# Altium PCB Touch_Screen.PcbDoc
Units mm, origin at the board's own origin, x right, y up, seen from the top; angles counter-clockwise.
Board outline 152.4 x 101.6 mm, 2 copper layers (Top Layer, Bottom Layer); 50 components, 72 nets, 255 pads, 54 vias.
Unrouted connection lines stored in the file: 9.
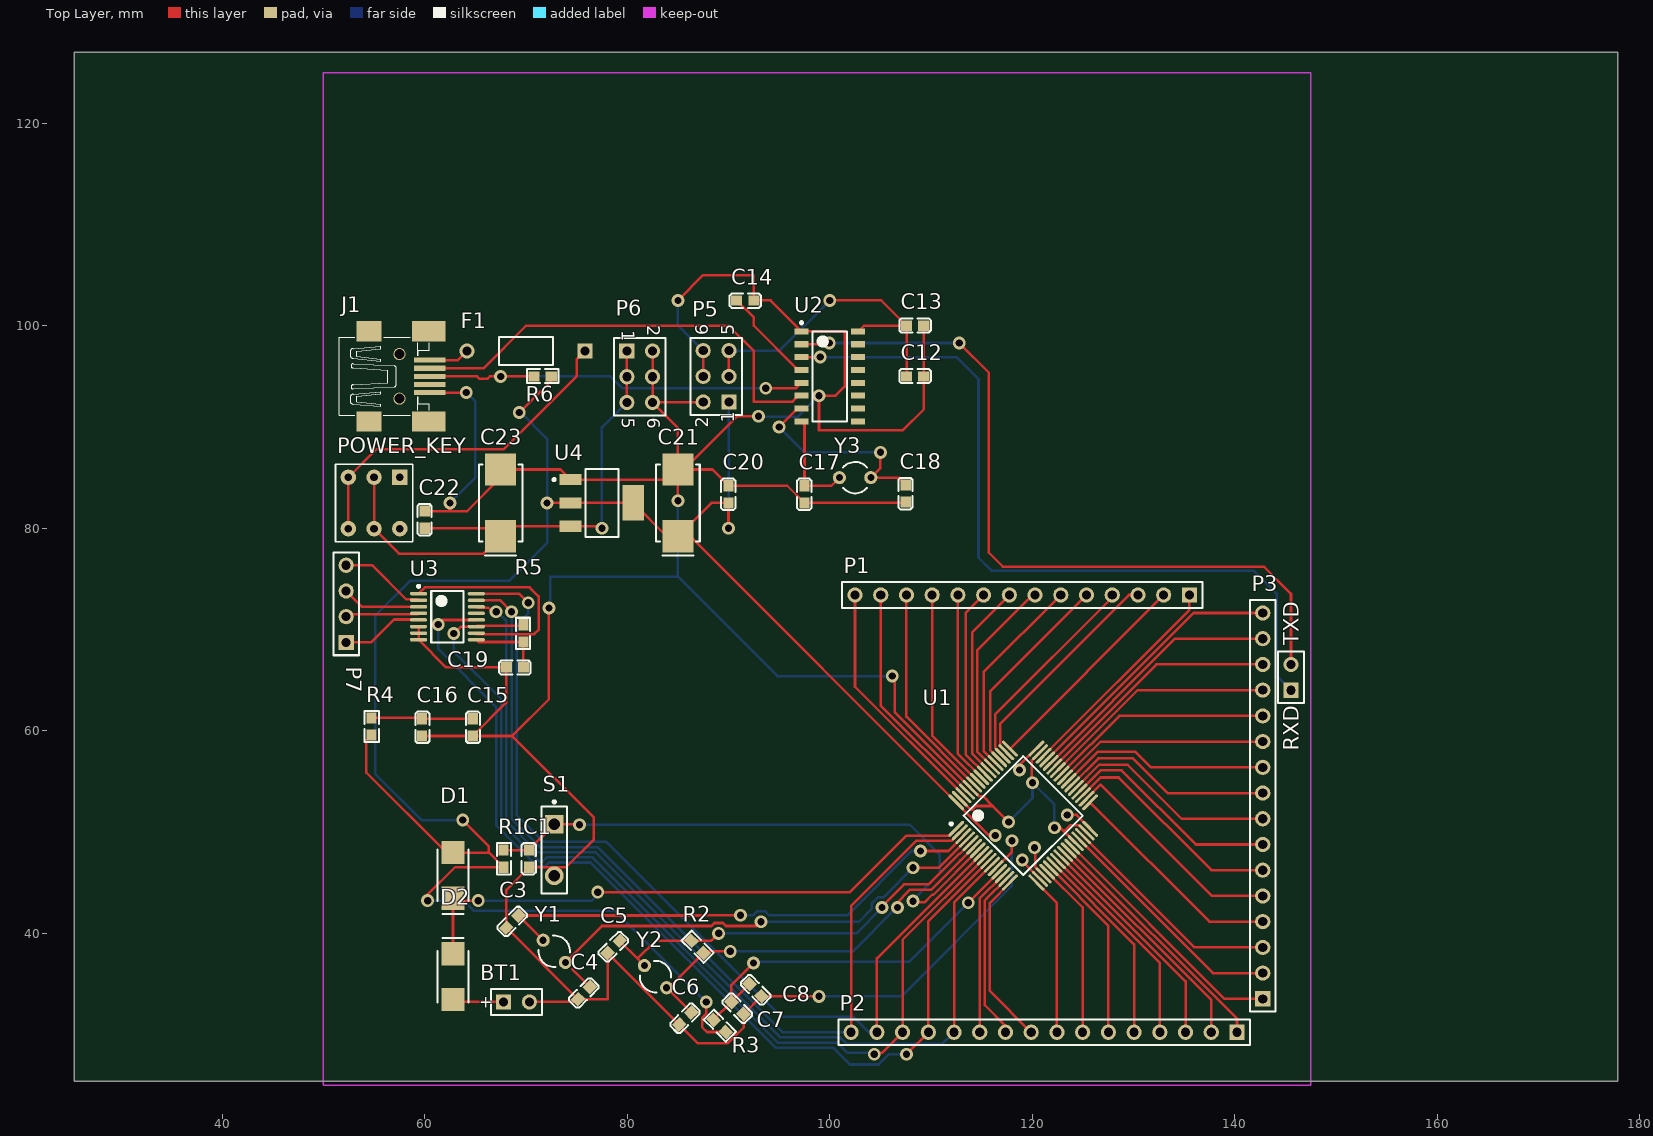
[diagram p0: Top Layer view]
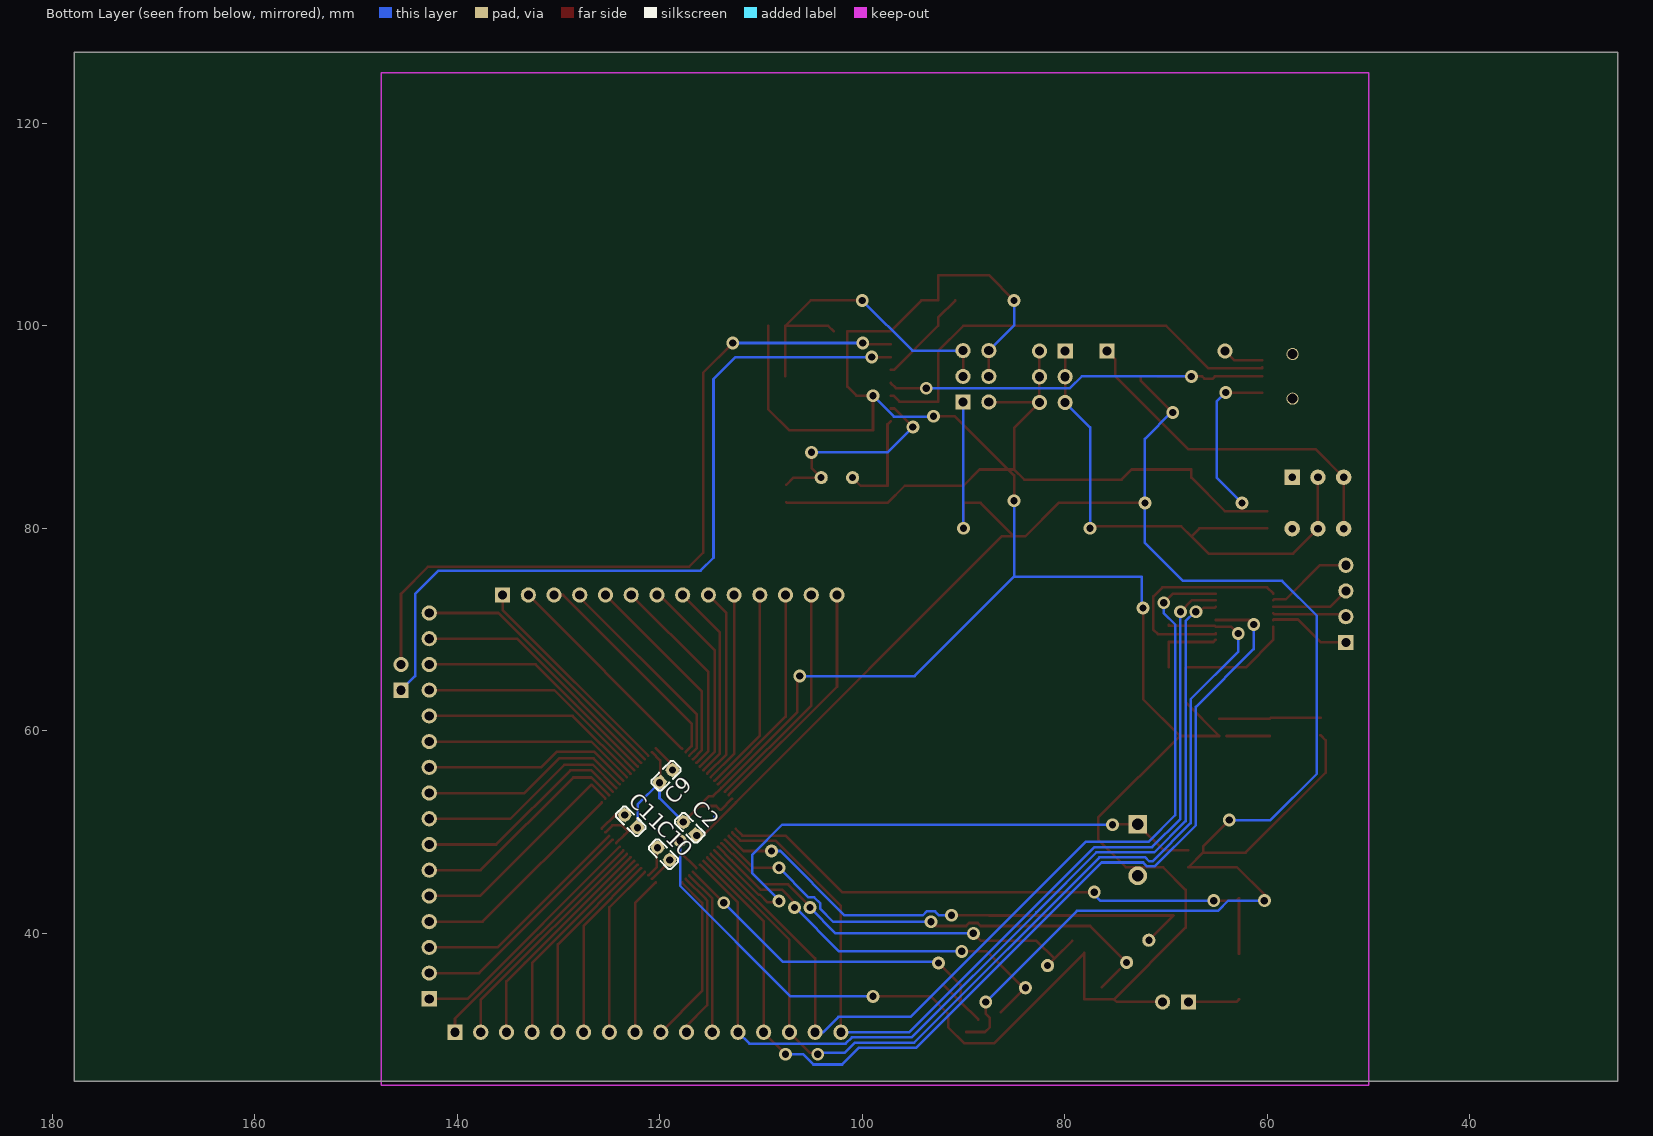
[diagram p1: Bottom Layer view, seen from below]

## Layer stack, top to bottom
Top Solder: solder mask 0.0102, Solder Resist, Dk 3.5
Top Layer: signal copper 0.0356
Dielectric 1: dielectric 0.32, FR-4, Dk 4.8
Bottom Layer: signal copper 0.0356
Bottom Solder: solder mask 0.0102, Solder Resist, Dk 3.5

## Board outline
25.4,25.4 177.8,25.4 177.8,127 25.4,127

## Design rules (kind name [scope] priority, off if disabled: settings)
Clearance [All] p1: gap=0.254
PolygonConnect [All] p1: connectstyle=Relief reliefconductorwidth=0.254 reliefentries=4 polygonreliefangle="90 Angle" airgapwidth=0.254
RoomDefinition miniSystrm [InComponentClass('miniSystrm')] p1: confinementstyle=ConfineIn formatcopy=TRUE lockcomponents=FALSE outline 0,0 50.8,0 50.8,25.4 0,25.4
RoutingVias [All] p1: holewidth=0.711 width=1.27 viastyle="Through Hole" minholewidth=0.711 minwidth=1.27 maxholewidth=0.711 maxwidth=1.27
SolderMaskExpansion [All] p1: expansion=0.102
Width [All] p1: maxlimit=0.254 minlimit=0.254 preferedwidth=0.254
30 further rules are at their usual default settings.

## Components (designator, comment, footprint, x,y, rotation, side; value= is the part's Value field where it differs from the comment)
BT1 "" BAT-2 69.064,33.229 r0 top
C1 "" CAP-0603 70.294,46.529 r90 top
C2 "" CAP-0603 117.661,50.995 r225 bottom
C3 "" CAP-0603 68.056,40.562 r45 top
C4 "" CAP-0603 75.127,33.491 r45 top
C5 "" CAP-0603 78.056,38.062 r45 top
C6 "" CAP-0603 85.127,30.991 r45 top
C7 "" CAP-0603 91.488,32.035 r135 top
C8 "" CAP-0603 92.062,34.997 r315 top
C9 "" CAP-0603 119.947,54.941 r135 bottom
C10 "" CAP-0603 118.999,47.253 r45 bottom
C11 "" CAP-0603 122.242,50.496 r45 bottom
C12 "" CAP-0603 107.58,95 r0 top
C13 "" CAP-0603 107.58,100 r0 top
C14 "" CAP-0603 92.5,102.5 r180 top
C15 "" CAP-0603 64.746,61.192 r270 top
C16 "" CAP-0603 59.746,61.192 r270 top
C17 "" CAP-0603 97.5,82.5 r90 top
C18 "" CAP-0603 107.5,82.58 r90 top
C19 "" CAP-0603 69.746,66.272 r180 top
C20 "" CAP-0603 90,82.5 r90 top
C21 "" CAP-7343 85,82.5 r90 top
C22 "" CAP-0603 60,80 r90 top
C23 "" CAP-7343 67.5,82.5 r90 top
D1 "" DIODE-SMA 62.794,45.729 r270 top
D2 "" DIODE-SMA 62.794,35.729 r90 top
F1 "500mA" PIN-W2/E2.8 70,97.5 r180 top
J1 "Mini_USB" miniUSB 57.5,95 r0 top
P1 "Header 14" HDR1X14 135.509,73.415 r180 top
P2 "Header 16" HDR1X16 140.208,30.235 r180 top
P3 "Header 16" HDR1X16 142.748,33.537 r90 top
P5 "VCC3.3" HDR2X3 90.04,92.46 r90 top
P6 "VCC5" HDR2X3 79.96,97.5 r270 top
P7 "Header 4" HDR1X4 52.246,68.732 r90 top
POWER_KEY "BUTTON" 六脚自锁开关 55,82.5 r270 top
R1 "" RES-0603 67.794,48.229 r270 top
R2 "" RES-0603 86.33,39.265 r315 top
R3 "" RES-0603 88.526,31.461 r315 top
R4 "" RES-0603 54.746,61.272 r270 top
R5 "" RES-0603 69.746,68.772 r90 top
R6 "" RES-0603 70.8,95 r0 top
S1 "RESET" SPST-2 72.794,48.229 r270 top
TXD "Header 2" HDR1X2 145.542,64.008 r90 top (schematic designator P4)
U1 "STM32F103RCT6" LQFP-64 119.097,51.634 r45 top
U2 "CH340G" SOP16 100,95 r0 top
U3 "XPT2046" TSSOP-16 62.246,71.272 r0 top
U4 "AMS1117-3.3" SOT223 77.5,82.5 r270 top
Y1 "32.768K" R38 72.794,38.229 r225 top
Y2 "32.768K" R38 82.794,35.729 r225 top
Y3 "12MHZ" R38 102.5,85 r270 top

## Footprints (in the part's own frame and the unit in brackets; to place one, negate y for a bottom-side part, rotate by r counter-clockwise, add the part's x,y. Pads: shape width x height; smd on the part's side, far side on the other; paste and mask are expansions set on the pad)
BAT-2 [mm] "Battery; 2 Leads"
  rect 1.5x1.5 hole 0.9: 1(-1.27,0)
  round 1.5 hole 0.9: 2(1.27,0)
  silkscreen extent -2.54,-1.27 2.54,1.27
CAP-0603 [mm]
  rect 1.1x1 smd: 1(0,0) 2(1.7,0)
  silkscreen extent -0.71,-0.67 2.39,0.73
CAP-7343 [mm] "钽电容"
  rect 3.2x3.05 smd: 1(-3.302,0) 2(3.302,0)
  silkscreen extent -5.21,-2.16 3.81,2.16, body extent -3.68,-1.91 3.68,1.91, height 2.95
DIODE-SMA [mm] "贴片二极管"
  rect 2.3x2.3 smd: 1(-2.25,0) 2(2.25,0)
  silkscreen extent -2.54,-1.52 3.81,1.52, body extent -2.92,-1.4 2.92,1.4, height 3
HDR1X2 [mm] "Connector; Header; 2 Position"
  rect 1.5x1.5 hole 0.9: 1(0,0)
  round 1.5 hole 0.9: 2(2.54,0)
  silkscreen extent -1.27,-1.27 3.81,1.27
HDR1X4 [mm] "Connector; Header; 4 Position"
  rect 1.5x1.5 hole 0.9: 1(0,0)
  round 1.5 hole 0.9: 2(2.54,0) 3(5.08,0) 4(7.62,0)
  silkscreen extent -1.27,-1.27 8.89,1.27
HDR1X14 [mm] "Connector; Header; 14 Position"
  rect 1.5x1.5 hole 0.9: 1(0,0)
  round 1.5 hole 0.9: 2(2.54,0) 3(5.08,0) 4(7.62,0) 5(10.16,0) 6(12.7,0) 7(15.24,0) 8(17.78,0) 9(20.32,0) 10(22.86,0) 11(25.4,0) 12(27.94,0) 13(30.48,0) 14(33.02,0)
  silkscreen extent -1.27,-1.27 34.29,1.27
HDR1X16 [mm] "Connector; Header; 16 Position"
  rect 1.5x1.5 hole 0.9: 1(0,0)
  round 1.5 hole 0.9: 2(2.54,0) 3(5.08,0) 4(7.62,0) 5(10.16,0) 6(12.7,0) 7(15.24,0) 8(17.78,0) 9(20.32,0) 10(22.86,0) 11(25.4,0) 12(27.94,0) 13(30.48,0) 14(33.02,0) 15(35.56,0) 16(38.1,0)
  silkscreen extent -1.27,-1.27 39.37,1.27
HDR2X3 [mm] "Connector; Header; 3x2 Position"
  rect 1.5x1.5 hole 0.9: 1(0,0)
  round 1.5 hole 0.9: 2(0,2.54) 3(2.54,0) 4(2.54,2.54) 5(5.08,0) 6(5.08,2.54)
  silkscreen extent -1.27,-1.27 6.35,3.81
LQFP-64 [mm] "LQFP64"
  oval 2.1x0.3 smd: 1(-5.6,3.75) 2(-5.6,3.25) 3(-5.6,2.75) 4(-5.6,2.25) 5(-5.6,1.75) 6(-5.6,1.25) 7(-5.6,0.75) 8(-5.6,0.25) 9(-5.6,-0.25) 10(-5.6,-0.75) 11(-5.6,-1.25) 12(-5.6,-1.75) 13(-5.6,-2.25) 14(-5.6,-2.75) 15(-5.6,-3.25) 16(-5.6,-3.75) 33(5.6,-3.75) 34(5.6,-3.25) 35(5.6,-2.75) 36(5.6,-2.25) 37(5.6,-1.75) 38(5.6,-1.25) 39(5.6,-0.75) 40(5.6,-0.25) 41(5.6,0.25) 42(5.6,0.75) 43(5.6,1.25) 44(5.6,1.75) 45(5.6,2.25) 46(5.6,2.75) 47(5.6,3.25) 48(5.6,3.75)
  oval 0.3x2.1 smd: 17(-3.75,-5.6) 18(-3.25,-5.6) 19(-2.75,-5.6) 20(-2.25,-5.6) 21(-1.75,-5.6) 22(-1.25,-5.6) 23(-0.75,-5.6) 24(-0.25,-5.6) 25(0.25,-5.6) 26(0.75,-5.6) 27(1.25,-5.6) 28(1.75,-5.6) 29(2.25,-5.6) 30(2.75,-5.6) 31(3.25,-5.6) 32(3.75,-5.6) 49(3.75,5.6) 50(3.25,5.6) 51(2.75,5.6) 52(2.25,5.6) 53(1.75,5.6) 54(1.25,5.6) 55(0.75,5.6) 56(0.25,5.6) 57(-0.25,5.6) 58(-0.75,5.6) 59(-1.25,5.6) 60(-1.75,5.6) 61(-2.25,5.6) 62(-2.75,5.6) 63(-3.25,5.6) 64(-3.75,5.6)
  silkscreen extent -5.72,-4.15 4.15,4.57, body extent -5,-5 5,5, height 1.6
miniUSB [mm]
  rect 2.5x2 smd: 0(-3,-4.45) 0(-3,4.45)
  rect 3.3x2 smd: 0(2.9,-4.45) 0(2.9,4.45)
  rect 3.1x0.5 smd: 1(3,1.6) 2(3,0.8) 3(3,0) 4(3,-0.8) 5(3,-1.6)
  round 1.2 hole 1 unplated: ""(0,-2.2) ""(0,2.2)
  silkscreen extent -5.92,-3.85 2.96,3.85
PIN-W2/E2.8 [mm] "Thru-Hole; 2 Leads"
  rect 1.5x1.5 hole 0.9: 1(-5.825,0)
  round 1.5 hole 0.9: 2(5.825,0)
  silkscreen extent -2.65,-1.4 2.65,1.4
R38 [mm] "Crystal, Thru-Hole; 2 Leads; Body 3.1 x 8.2 mm (Dia.xH)"
  round 1.3 hole 0.7: 1(0,1.55) 2(0,-1.55)
  silkscreen extent -1.55,-1.19 1.55,1.17
RES-0603 [mm] "1/10W"
  rect 1.1x1 smd: 1(0,0) 2(1.7,0)
  silkscreen extent -0.71,-0.67 2.39,0.73
SOP16 [mm] "SOP, 16-Leads, Body 8.55x3.95mm, Pitch 1.27mm, IPC Medium Density"
  rect 1.4x0.6 smd: 1(-2.8,4.445) 2(-2.8,3.175) 3(-2.8,1.905) 4(-2.8,0.635) 5(-2.8,-0.635) 6(-2.8,-1.905) 7(-2.8,-3.175) 8(-2.8,-4.445) 9(2.8,-4.445) 10(2.8,-3.175) 11(2.8,-1.905) 12(2.8,-0.635) 13(2.8,0.635) 14(2.8,1.905) 15(2.8,3.175) 16(2.8,4.445)
  silkscreen extent -2.92,-4.45 1.7,5.42, body extent -2.1,-4.45 2.1,4.45, height 1.7
SOT223 [mm] "SOT-223/SC-73; 4 Leads; Body 6.7 x 7.3 mm, inc. leads (LxW max)"
  rect 1.1x2.15 smd: 1(-2.3,-3.1) 2(0,-3.1) 3(2.3,-3.1)
  rect 3.5x2.15 smd: 4(0,3.1)
  silkscreen extent -3.35,-4.85 3.35,1.63
SPST-2 [mm] "Switch; 2 Leads"
  rect 1.85x1.85 hole 1.1: 1(-2.54,0)
  round 1.85 hole 1.1: 2(2.54,0)
  silkscreen extent -4.89,-1.27 4.28,1.27
TSSOP-16 [mm]
  oval 1.7x0.35 smd: 1(-2.85,2.275) 2(-2.85,1.625) 3(-2.85,0.975) 4(-2.85,0.325) 5(-2.85,-0.325) 6(-2.85,-0.975) 7(-2.85,-1.625) 8(-2.85,-2.275) 9(2.85,-2.275) 10(2.85,-1.625) 11(2.85,-0.975) 12(2.85,-0.325) 13(2.85,0.325) 14(2.85,0.975) 15(2.85,1.625) 16(2.85,2.275)
  silkscreen extent -2.97,-2.55 1.6,3.12, body extent -2.25,-2.55 2.25,2.55, height 1.1
六脚自锁开关 [mil]
  rect 60x60 hole 30: 1(-100,100)
  round 60 hole 30: 2(-100,0) 3(-100,-100) 4(100,-100) 5(100,0) 6(100,100)
  silkscreen extent -150,-150 150,150

## Part data
BT1: library part Battery, "Multicell Battery"
C1 C2 C3 C4 C5 C6 C7 C8 C9 C10 C11 C12 C13 C14 C15 C16 C17 C18 C19 C20 C22: library part Cap, "Capacitor"
C21 C23: library part "Cap Pol1", "Polarized Capacitor (Radial)"
D1 D2: library part "Diode 1N4001", "1 Amp General Purpose Rectifier"
F1: library part "Fuse 1", "Fuse"
J1: "USB 2.0, Right Angle, SMT, B Type, Receptacle, 5 Position, Black"
P1: "Header, 14-Pin"
P2 P3: "Header, 16-Pin"
P5 P6: library part "Header 3X2", "Header, 3-Pin, Dual row"
P7: "Header, 4-Pin"
R1 R2 R3 R4 R5 R6: library part Res2, "Resistor"
S1: library part SW-PB, "Switch"
TXD: "Header, 2-Pin"
Y1 Y2 Y3: library part XTAL, "Crystal Oscillator"

## Via types
v1: diameter 1.27, hole 0.711, Top Layer to Bottom Layer, 54 vias

## Nets (pads, with @x,y where several pads share a name; then routed paths per layer and width w, separated by ;. In a path a pad name is that pad's centre, name@x,y a point inside that pad or via, vN(x,y) a via of type N, cw(c..) or ccw(c..) an arc to the next point about the centre after c; other vN are vias at no path point)
BOOT0: BT1.2 C1.1 C2.1 C3.1 C4.1 C5.1 C6.1 C7.1 C8.2 C9.1 C10.1 C11.1 C12.2 C13.2 C14.1 C15.2 C16.2 C17.1 C18.1 C19.2 C20.2 C21.2 C22.2 C23.2 J1.5 P5.2 P5.4 P5.6 P6.2 P6.4 P6.6 S1.2 U1.12 U1.18 U1.28 U1.31 U1.47 U1.60 U1.63 U2.1 U3.6 U3.7 U3.8 U4.1 | length 411.4
  Top Layer w0.254: U3.6 U3.7 U3.8 62.121,66.272 C19.2 68.046,62.792 C15.2 68.636,59.492 ; C16.2 64.026,59.492 ; C22.2 62.5,81.7 ; J1.5 v1(64.1,93.4) ; v1(62.5,82.5) 62.5,81.7 ; BT1.2 74.865,33.229 C4.1 ; v1(72.263,72.136) 72.263,63.119 68.636,59.492 ; P6.2 P6.4 P6.6 ; v1(85,82.714) 85,85.217 C21.2@85.585,85.802 ; v1(85,102.5) 87.5,105 92.5,105 C14.1 94.145,102.5 U2.1 101.473,99.445 101.473,93.98 100.584,93.091 v1(98.933,93.091) 98.933,89.662 107.188,89.662 109.28,91.754 C12.2 C13.2 ; P5.2 82.54,92.46 P6.6 ; P5.4 P5.6 ; v1(92.964,91.059) 90.842,91.059 C21.2@85.585,85.802 ; v1(98.933,33.782) 98.92,33.795 C8.2 91.505,32.035 C7.1 91.544,31.979 91.515,31.95 91.515,30.729 89.921,29.136 86.983,29.136 C6.1 C5.1 78.056,33.491 C4.1 ; v1(106.172,65.405) 106.426,65.151 106.426,61.83 U1.60 114.714,53.542 115.114,53.542 116.078,52.578 ; C18.1 107.42,82.5 C17.1 95.8,84.2 C20.2 88.398,85.802 C21.2@85.585,85.802 ; U1.63 113.938,52.197 114.046,52.197 114.427,52.578 116.078,52.578 ; U1.12 117.983,48.045 v1(117.983,49.149) ; v1(117.661,50.995) 116.078,52.578 ; v1(118.999,47.253) 118.999,47.136 U1.18 ; v1(120.015,54.873) 119.945,54.943 119.945,57.078 U1.47 ; v1(122.174,50.428) 122.778,50.428 123.129,50.077 ; U1.28 123.48,49.725 123.129,50.077 ; U1.31 124.654,50.673 123.726,50.673 123.129,50.077 ; 62.5,81.7 64.2,81.7 67.5,85 C23.2 73.398,85.802 U4.1 83.998,84.8 C21.2 ; 68.636,59.492 76.708,51.42 76.708,49.276 73.961,46.529 C1.1 68.056,44.291 C3.1 C4.1 ; P6.6 85,89.92 C21.2 ; C21.2 C21.2@85.585,85.802
  Bottom Layer w0.254: v1(62.5,82.5) 65,85 65,92.5 v1(64.1,93.4) ; v1(72.263,72.136) 72.263,72.263 72.39,72.39 72.39,75.221 85,75.221 ; v1(85,82.714) 85,75.221 ; v1(85,102.5) 85,100.04 P5.6 ; v1(92.964,91.059) 93.007,91.016 96.858,91.016 v1(98.933,93.091) ; v1(98.933,33.782) 107.061,33.782 117.983,44.704 v1(117.983,49.149) ; v1(106.172,65.405) 94.816,65.405 85,75.221 ; 114.613,51.512 114.622,51.512 ; v1(117.661,50.995) 120.015,53.349 v1(120.015,54.873) 122.174,52.714 v1(122.174,50.428) C11.1
"CH340 D+": J1.3 R6.1 U2.5 | length 40.9
  Top Layer w0.254: J1.3 65.163,95 65.379,94.784 66.221,94.784 66.437,95 v1(67.5,95) R6.1 ; v1(93.671,93.829) 96.664,93.829 U2.5
  Bottom Layer w0.254: v1(67.5,95) 78.321,95 79.492,93.829 v1(93.671,93.829)
"CH340 D-": J1.2 U2.6 | length 44.8
  Top Layer w0.254: J1.2@60.5,95.881 J1.2 65.8,95.8 70,100 90,100 92.5,97.5 92.5,92.5 96.336,92.5 96.931,93.095 U2.6
NetBT1_1: BT1.1 D2.1 | length 5.1
  Top Layer w0.254: D2.1 63.044,33.229 BT1.1
NetC3_2: C3.2 U1.3 Y1.2 | length 51
  Top Layer w0.254: Y1.2 C3.2 87.44,41.765 87.459,41.783 v1(91.186,41.783) ; v1(108.966,48.133) 111.707,48.133 U1.3
  Bottom Layer w0.254: v1(91.186,41.783) 92.416,41.783 92.797,42.164 93.639,42.164 94.02,41.783 101.727,41.783 108.077,48.133 v1(108.966,48.133)
NetC4_2: C4.2 U1.4 Y1.1 | length 47.7
  Top Layer w0.254: Y1.1 77.486,40.729 88.314,40.729 88.606,41.021 89.448,41.021 89.74,40.729 92.799,40.729 v1(93.218,41.148) ; 74.562,36.461 C4.2 ; v1(108.204,46.482) 110.763,46.482 U1.4
  Bottom Layer w0.254: v1(93.218,41.148) 102.87,41.148 104.14,42.418 104.14,42.966 104.735,43.561 105.283,43.561 v1(108.204,46.482)
NetC5_2: C5.2 R2.1 U1.5 Y2.2 | length 41.1
  Top Layer w0.254: C5.2 81.026,37.497 ; Y2.2 81.026,37.497 ; v1(89.027,40.005) 88.287,39.265 R2.1 82.794,39.265 81.026,37.497 ; v1(105.156,42.545) 105.156,42.672 107.315,44.831 109.763,44.831 112.776,47.844 112.832,47.844 U1.5
  Bottom Layer w0.254: v1(89.027,40.005) 102.616,40.005 v1(105.156,42.545)
NetC6_2: C6.2 R2.2 U1.6 Y2.1 | length 40.6
  Top Layer w0.254: C6.2 Y2.1 84.102,34.633 R2.2 87.696,38.227 v1(90.17,38.227) ; v1(106.68,42.545) 106.426,42.545 106.299,42.672 107.188,43.561 107.188,43.601 107.91,44.323 110.03,44.323 112.903,47.196 112.903,47.208 U1.6
  Bottom Layer w0.254: v1@90.297,38.1 v1(90.17,38.227) 102.275,38.227 106.593,42.545 v1(106.68,42.545)
NetC7_2: C7.2 C8.1 R3.1 U1.13 | length 38.4
  Top Layer w0.254: R3.1 88.526,31.478 C7.2 ; C8.1 90.302,33.237 C7.2 ; v1(92.456,37.084) 90.286,34.914 C7.2 ; v1(113.665,43.02) U1.13
  Bottom Layer w0.254: v1(92.456,37.084) 92.329,37.211 107.856,37.211 v1(113.665,43.02) v1@113.665,42.672
NetC14_2: C14.2 U2.4 | length 9.7
  Top Layer w0.254: C14.2 92.5,100.8 92.5,100 96.865,95.635 U2.4
NetC17_2: C17.2 U2.8 Y3.2 | length 10.3
  Top Layer w0.254: U2.8 97.5,90.255 C17.2 100.15,84.2 Y3.2
NetC18_2: C18.2 U2.7 Y3.1 | length 20.6
  Top Layer w0.254: v1(95,90) 96.825,91.825 U2.7 ; v1(105,87.5) 105,85.95 Y3.1 106.78,85 C18.2
  Bottom Layer w0.254: v1(95,90) 97.5,87.5 v1(105,87.5)
NetD1_2: D1.2 D2.2 U1.1 | length 58.1
  Top Layer w0.254: D2.2 D1.2@62.794,43.229 ; D1.2 63.044,43.229 v1(65.294,43.229) ; v1(77.089,44.069) 101.981,44.069 107.569,49.657 111.817,49.657 U1.1
  Bottom Layer w0.254: v1(65.294,43.229) 76.503,43.229 77.089,43.815 v1(77.089,44.069)
NetF1_1: F1.1 POWER_KEY.3 POWER_KEY.4 | length 34.6
  Top Layer w0.254: POWER_KEY.4 POWER_KEY.3 55.203,87.783 67.783,87.783 75,95 75,96.675 F1.1
NetF1_2: F1.2 J1.1 | length 4
  Top Layer w0.254: J1.1 63.275,96.6 F1.2
PA0: P2.11 U1.14 | length 16.4
  Top Layer w0.254: P2.11 114.792,30.251 114.792,43.44 U1.14
PA1: P2.10 U1.15 | length 16.9
  Top Layer w0.254: 115.443,43.384 U1.15 ; 115.449,43.378 115.3,43.229 115.3,32.918 117.348,30.87 P2.10
PA2: P2.9 U1.16 | length 17.3
  Top Layer w0.254: U1.16 117.789,45 115.808,43.019 115.808,34.315 P2.9
PA3: P2.8 U1.17 | length 15.6
  Top Layer w0.254: U1.17 122.428,43 P2.8
PA4: P2.7 U1.20 | length 17.3
  Top Layer w0.254: U1.20 124.968,42.581 P2.7
PA5: P2.6 U1.21 | length 18.6
  Top Layer w0.254: U1.21 127.508,40.748 P2.6
PA6: P2.5 U1.22 | length 19.8
  Top Layer w0.254: U1.22 130.048,38.915 P2.5
PA7: P2.4 U1.23 | length 21.1
  Top Layer w0.254: U1.23 132.588,37.082 P2.4
PA8: P3.12 U1.41 | length 22.2
  Top Layer w0.254: U1.41 128.586,61.477 P3.12
PA9: P3.13 U1.42 | length 23.5
  Top Layer w0.254: U1.42 123.392,56.99 ; 123.387,56.995 130.408,64.017 P3.13
PA10: P3.14 U1.43 | length 24.8
  Top Layer w0.254: U1.43 132.252,66.557 P3.14
PA11: P3.15 U1.44 | length 26
  Top Layer w0.254: U1.44 134.085,69.097 P3.15
PA12: P3.16 U1.45 | length 27.3
  Top Layer w0.254: U1.45 135.918,71.637 P3.16
PA13: P1.1 U1.46 | length 21.8
  Top Layer w0.254: U1.46 135.509,71.935 P1.1
PA14: P1.2 U1.49 | length 21.5
  Top Layer w0.254: U1.49 117.811,58.267 117.821,58.267 P1.2
PA15: P1.3 U1.50 | length 22.4
  Top Layer w0.254: U1.50 116.84,58.487 116.84,60.715 129.54,73.415 P1.3 P1.3@130.429,72.907
PB0: P2.1 U1.26 | length 24.9
  Top Layer w0.254: U1.26 140.208,31.583 P2.1
PB1: P3.1 U1.27 | length 25
  Top Layer w0.254: U1.27 138.962,33.537 P3.1
PB3: P1.8 U1.55 | length 19.5
  Top Layer w0.254: U1.55 114.046,57.745 114.046,69.732 P1.8
PB4: P1.9 U1.56 | length 19.2
  Top Layer w0.254: P1.9 113.411,71.637 113.411,57.673 U1.56
PB5: P1.10 U1.57 | length 19
  Top Layer w0.254: P1.10 112.649,57.728 U1.57
PB6: P1.11 U1.58 | length 20.2
  Top Layer w0.254: P1.11 110.109,59.561 U1.58
PB7: P1.12 U1.59 | length 21.5
  Top Layer w0.254: P1.12 107.569,61.394 U1.59
PB8: P1.13 U1.61 | length 22.9
  Top Layer w0.254: P1.13 105.029,62.52 U1.61
PB9: P1.14 U1.62 | length 24.2
  Top Layer w0.254: P1.14 102.489,64.353 U1.62
PB10: P3.2 U1.29 | length 23.6
  Top Layer w0.254: U1.29 137.836,36.077 P3.2
PB11: P3.3 U1.30 | length 22.3
  Top Layer w0.254: U1.30 136.003,38.617 P3.3
PB12: P3.4 U1.33 | length 21.9
  Top Layer w0.254: U1.33 137.494,41.157 P3.4
PB13: P3.5 U1.34 | length 22.5
  Top Layer w0.254: U1.34 126.746,54.687 137.736,43.697 P3.5
PB14: P3.6 U1.35 | length 22.3
  Top Layer w0.254: U1.35 126.746,55.394 128.511,55.394 137.668,46.237 P3.6
PB15: P3.7 U1.36 | length 22
  Top Layer w0.254: U1.36 126.746,56.101 128.82,56.101 136.144,48.777 P3.7
PC0: P2.15 U1.8 U3.16 | length 93.3
  Top Layer w0.254: U3.16 69.328,73.547 v1(70.231,72.644) ; P2.15 104.648,37.538 U1.8
  Bottom Layer w0.254: v1(70.231,72.644) 70.231,71.628 69.088,70.485 69.088,51.689 71.75,49.027 77.933,49.027 95.21,31.75 102.362,31.75 103.877,30.235 P2.15
PC1: P2.14 R5.2 U1.9 U3.11 | length 99.2
  Top Layer w0.254: v1(62.865,69.596) 63.566,70.297 U3.11 65.19,70.391 69.746,70.391 R5.2 ; v1(104.394,28.067) 104.267,28.194 105.147,28.194 P2.14 107.188,39.371 U1.9
  Bottom Layer w0.254: v1(62.865,69.596) 62.865,67.818 67.564,63.119 67.564,50.887 71.334,47.117 71.657,47.117 72.043,47.503 76.576,47.503 94.86,29.219 100.702,29.219 101.727,28.194 104.394,28.194 v1(104.394,28.067)
PC2: P2.13 U1.10 U3.12 | length 99.6
  Top Layer w0.254: v1(61.341,70.485) 61.803,70.947 U3.12 ; v1(107.569,28.067) 107.569,28.076 P2.13 109.728,41.204 U1.10
  Bottom Layer w0.254: v1(61.341,70.485) 61.341,68.072 67.056,62.357 67.056,50.677 71.124,46.609 71.867,46.609 72.253,46.995 76.366,46.995 94.65,28.711 100.321,28.711 101.981,27.051 104.815,27.051 105.831,28.067 v1(107.569,28.067)
PC3: P2.12 U1.11 U3.14 | length 95.2
  Top Layer w0.254: U3.14 65.19,72.153 66.292,72.153 66.69,71.755 v1(67.056,71.755) ; P2.12 112.268,43.037 U1.11
  Bottom Layer w0.254: v1(67.056,71.755) 67.143,71.755 68.072,70.826 68.072,51.098 71.159,48.011 76.874,48.011 82.804,42.081 82.804,42.037 95.114,29.727 101.017,29.727 101.64,29.104 111.137,29.104 P2.12
PC4: P2.3 U1.24 | length 22.3
  Top Layer w0.254: U1.24 133.295,37.082 135.128,35.249 P2.3
PC5: P2.2 U1.25 | length 23.6
  Top Layer w0.254: U1.25 137.668,33.416 P2.2
PC6: P3.8 U1.37 | length 21.6
  Top Layer w0.254: U1.37 126.589,56.651 129.413,56.651 134.747,51.317 P3.8
PC7: P3.9 U1.38 | length 21.3
  Top Layer w0.254: U1.38 126.517,57.286 129.921,57.286 133.35,53.857 P3.9
PC8: P3.10 U1.39 | length 21
  Top Layer w0.254: U1.39 126.445,57.921 130.175,57.921 131.699,56.397 P3.10
PC9: P3.11 U1.40 | length 21
  Top Layer w0.254: U1.40 126.754,58.937 P3.11
PC10: P1.4 U1.51 | length 21
  Top Layer w0.254: U1.51 116.332,58.288 116.332,61.604 127.889,73.161 P1.4
PC11: P1.5 U1.52 | length 20.6
  Top Layer w0.254: U1.52 115.824,58.089 115.824,63.89 P1.5
PC12: P1.6 U1.53 | length 20.2
  Top Layer w0.254: U1.53 115.189,58.017 115.189,65.795 P1.6
PC13: P2.16 U1.2 U3.15 | length 93.3
  Top Layer w0.254: U3.15 67.438,72.897 v1(68.58,71.755) ; P2.16 102.108,42.712 108.545,49.149 112.014,49.149 112.023,49.158 ; 111.629,49.158 112.023,49.158 ; U1.2 112.837,49.972 112.023,49.158
  Bottom Layer w0.254: v1(68.58,71.755) 68.58,51.308 71.369,48.519 77.084,48.519 95.368,30.235 P2.16
PD2: P1.7 U1.54 | length 20.1
  Top Layer w0.254: U1.54 114.554,57.945 114.554,67.954 120.015,73.415 P1.7
RESET: C1.2 R1.1 S1.1 U1.7 | length 59.7
  Top Layer w0.254: R1.1 C1.2 70.294,48.269 S1.1 75.254,50.769 v1(75.294,50.729) ; v1(108.204,43.18) 108.331,43.053 109.347,43.053 110.109,43.815 110.218,43.815 U1.7
  Bottom Layer w0.254: v1(75.294,50.729) 107.894,50.729 110.871,47.752 110.871,45.974 108.204,43.307 v1(108.204,43.18)
RXD: TXD.1 U2.3 | length 77.1
  Top Layer w0.254: U2.3 v1(99.064,96.905)
  Bottom Layer w0.254: v1(99.064,96.905) 112.518,96.905 114.681,94.742 114.681,77.089 115.951,75.819 141.859,75.819 144.145,73.533 144.145,65.405 TXD.1
TVDD: C15.1 C16.1 C19.1 R4.1 R5.1 U3.1 U3.9 U3.10 | length 39.5
  Top Layer w0.254: R4.1 59.666,61.272 C16.1 C15.1 ; U3.1 60.017,74.168 70.358,74.168 71.247,73.279 71.247,69.977 70.811,69.541 65.096,69.541 U3.10 ; U3.9 65.321,68.772 R5.1 C19.1
TXD: TXD.2 U2.2 | length 76.1
  Top Layer w0.254: U2.2 99.945,98.175 99.949,98.171 v1(99.949,98.298) ; v1(112.776,98.298) 115.697,95.377 115.697,77.597 117.094,76.2 142.875,76.2 145.542,73.533 TXD.2
  Bottom Layer w0.254: v1(99.949,98.298) v1(112.776,98.298)
VCC3.3: C2.2 C10.2 C12.1 C13.1 C20.1 C21.1 D1.1 P5.1 P5.3 P5.5 R1.2 R3.2 R4.2 R6.2 U1.19 U1.64 U2.16 U4.2 U4.4 | length 252.6
  Top Layer w0.254: R4.2 54.229,59.055 54.229,55.88 62.13,47.979 D1.1 66.344,47.979 ; v1(60.294,43.229) 60.294,43.818 63.005,46.529 R1.2 66.344,47.979 ; v1(63.754,51.181) 66.344,48.591 66.344,47.979 ; v1(69.342,91.44) 72.5,94.598 R6.2 ; v1(72.086,82.5) U4.2 U4.4 83.902,79.198 C21.1 ; v1(87.794,33.229) 87.794,32.046 87.403,31.654 87.403,30.729 87.873,30.259 R3.2 ; v1(90,80) C20.1 88.302,82.5 C21.1 ; P5.3 P5.5 ; v1(100,102.5) 105.08,102.5 C13.1 ; U2.16 103.355,100 C13.1 ; C12.1 C13.1 ; U1.64@112.464,52.92 115.718,49.666 v1(116.332,49.666) ; U1.64 86.23,79.198 C21.1 ; v1(120.201,48.464) 120.269,48.396 120.269,46.573 U1.19
  Bottom Layer w0.254: v1(60.294,43.229) 63.857,43.229 64.873,42.213 78.81,42.213 v1(87.794,33.229) ; v1(63.754,51.181) 59.69,51.181 55.118,55.753 55.118,71.374 58.547,74.803 68.326,74.803 72.086,78.563 v1(72.086,82.5) 72.086,88.823 69.342,91.567 v1(69.342,91.44) ; v1(90,80) 90.04,80.04 P5.1 ; P5.5 95.04,97.54 v1(100,102.5) ; v1(116.332,49.666) C2.2 ; C10.2 v1(120.201,48.464)
VCC3.4: C9.2 C11.2 U1.32 U1.48 | length 5.6
  Top Layer w0.254: v1(118.745,56.143) 118.745,56.629 U1.48@120.383,58.267 ; v1(123.444,51.698) 124.38,51.698 U1.32@125.73,50.348
VCC5: C22.1 C23.1 P6.1 P6.3 P6.5 POWER_KEY.2 POWER_KEY.5 U4.3 | length 56.2
  Top Layer w0.254: POWER_KEY.2 POWER_KEY.5 57.46,77.5 65.802,77.5 C23.1 ; C22.1 66.698,80 C23.1 ; v1(77.5,80) 77.3,80.2 U4.3 68.502,80.2 C23.1 ; P6.5 P6.3 P6.1
  Bottom Layer w0.254: v1(77.5,80) 77.5,89.96 P6.5
X+: P7.4 U3.2 | length 8.6
  Top Layer w0.254: P7.4 54.804,76.352 58.165,72.991 59.302,72.991 U3.2
X-: P7.2 U3.4 | length 7.4
  Top Layer w0.254: P7.2 52.246,71.503 59.302,71.503 U3.4
Y+: P7.3 U3.3 | length 7.8
  Top Layer w0.254: P7.3 53.811,72.247 U3.3
Y-: P7.1 U3.5 | length 8.1
  Top Layer w0.254: P7.1 54.706,68.732 56.969,70.995 59.348,70.995 U3.5
pads on no net: J1. J1.0 J1.4 POWER_KEY.1 POWER_KEY.6 U2.9 U2.10 U2.11 U2.12 U2.13 U2.14 U2.15 U3.13

## Keep-outs
Keep-Out Layer:
  lines w0.152: 50,25 147.5,25 147.5,125 50,125 50,25

## Silkscreen, mask and mechanical layers (free items; w line width, h text height)
Top Overlay:
  text "RXD" at 146.304,58.039 h1.52 r90

## Text inside footprints (layer, text, board x,y; h text height)
BT1: Top Overlay "+" at 65.394,32.652 h1.15
P5: Top Overlay "6" at 88.008,99.064 h1.27 r90; Top Overlay "5" at 90.548,99.064 h1.27 r90; Top Overlay "2" at 88.008,89.92 h1.27 r90; Top Overlay "1" at 90.548,90.428 h1.27 r90
P6: Top Overlay "6" at 81.992,90.896 h1.27 r270; Top Overlay "5" at 79.452,90.896 h1.27 r270; Top Overlay "2" at 81.992,100.04 h1.27 r270; Top Overlay "1" at 79.452,99.532 h1.27 r270